# Altium PCB ESP32_HID.PcbDoc
Units mm, origin at the board's own origin, x right, y up, seen from the top; angles counter-clockwise.
Board outline 279.25 x 101.6 mm, 2 copper layers (Top Layer, Bottom Layer); 77 components, 116 nets, 483 pads, 0 vias.
Unrouted connection lines stored in the file: 326.
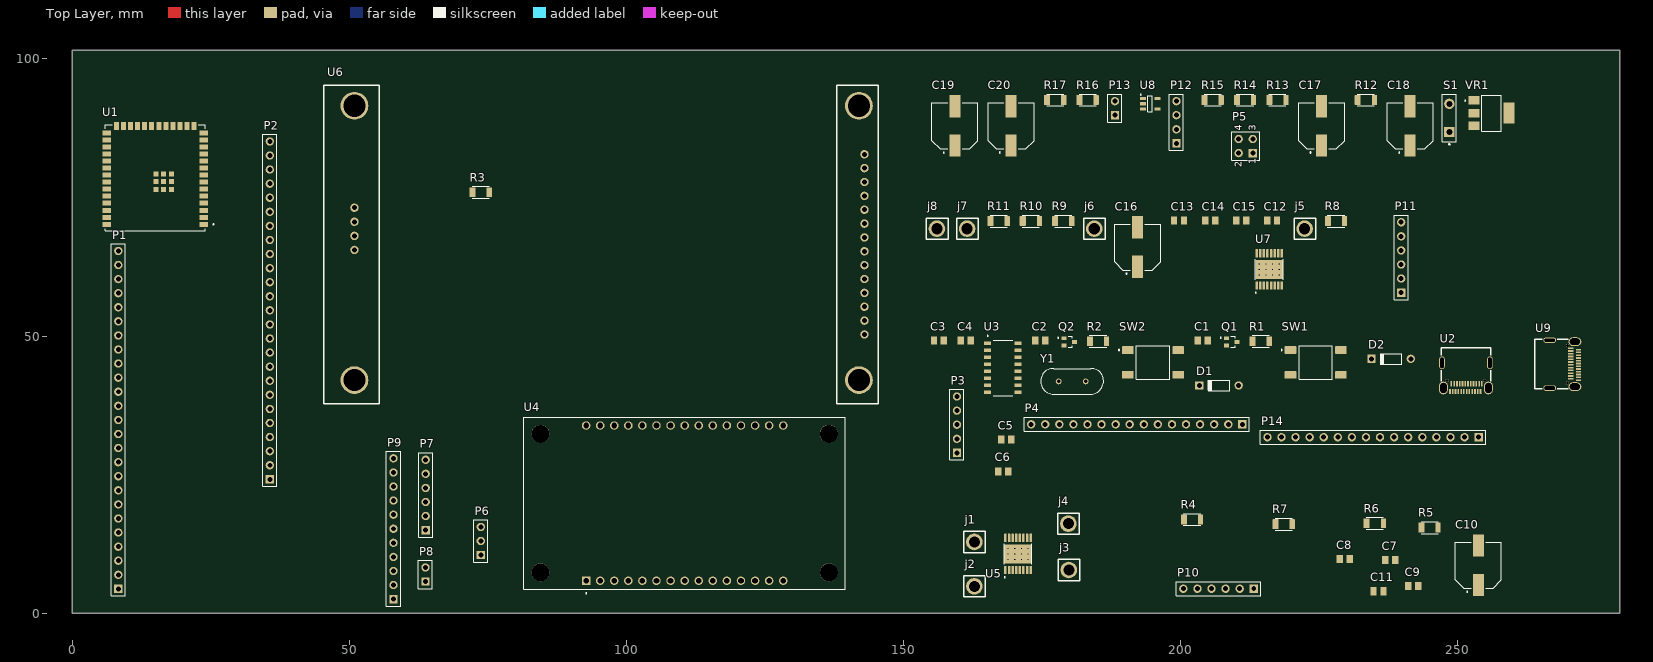
[diagram p0: Top Layer view]
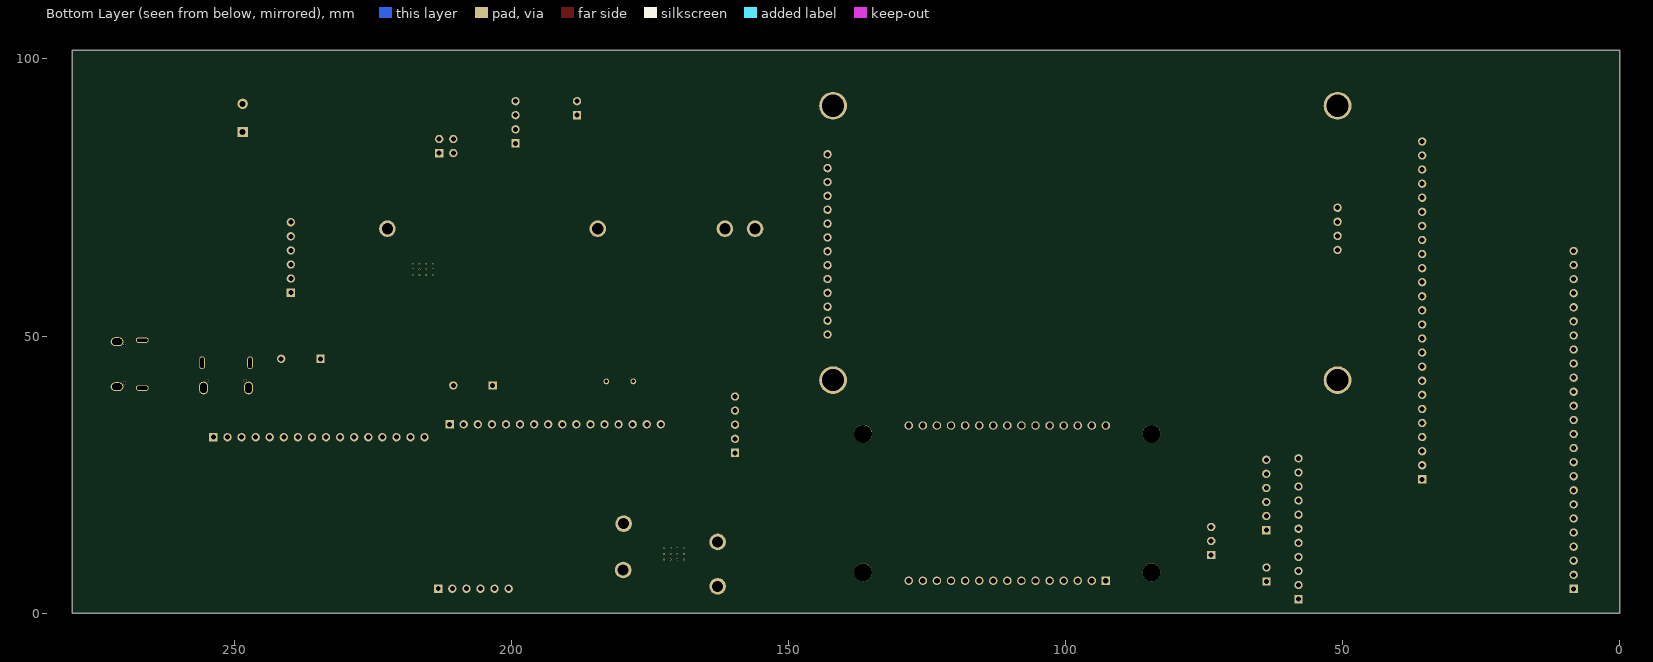
[diagram p1: Bottom Layer view, seen from below]

## Layer stack, top to bottom
Top Solder: solder mask 0.0102, Solder Resist, Dk 3.5
Top Layer: signal copper 0.0356
Dielectric 1: dielectric 0.32, FR-4, Dk 4.8
Bottom Layer: signal copper 0.0356
Bottom Solder: solder mask 0.0102, Solder Resist, Dk 3.5

## Board outline
0,0 279.248,0 279.248,101.6 0,101.6

## Design rules (kind name [scope] priority, off if disabled: settings)
Clearance [All] p1: gap=0.254 ignorepadtopadclearanceinfootprint=FALSE except(0: Arc-Hole Track-Hole SMDPad-Hole THPad-Hole Via-Hole Fill-Hole Poly-Hole Region-Hole Text-Hole)
PolygonConnect [All] p1: connectstyle=Relief reliefconductorwidth=0.254 reliefentries=4 polygonreliefangle="90 Angle" airgapwidth=0.254
RoomDefinition U_NodeMCU [InComponentClass('U_NodeMCU')] p1: confinementstyle=ConfineIn formatcopy=TRUE lockcomponents=FALSE outline 56.363,0.914 141.453,0.914 141.453,35.916 56.363,35.916
RoomDefinition U_USB [InComponentClass('U_USB')] p2: confinementstyle=ConfineIn formatcopy=TRUE lockcomponents=FALSE outline 154.356,24.308 274.955,24.308 274.955,50.851 154.356,50.851
RoomDefinition "U_DC Motor Control_2" [InComponentClass('U_DC Motor Control_2')] p3: confinementstyle=ConfineIn formatcopy=TRUE lockcomponents=FALSE outline 153.746,56.21 241.402,56.21 241.402,72.161 153.746,72.161
RoomDefinition "U_DC Motor Control" [InComponentClass('U_DC Motor Control')] p4: confinementstyle=ConfineIn formatcopy=TRUE lockcomponents=FALSE outline 154.178,22.327 154.178,1.27 154.102,1.194 259.232,1.194 259.232,21.615 258.42,22.428 247.371,22.428
RoomDefinition "U_Power Regulation" [InComponentClass('U_Power Regulation')] p5: confinementstyle=ConfineIn formatcopy=TRUE lockcomponents=FALSE outline 154.559,80.01 260.756,80.01 260.756,94.005 154.559,94.005
RoomDefinition U_ESP32_S2_solo [InComponentClass('U_ESP32_S2_solo')] p6: confinementstyle=ConfineIn formatcopy=TRUE lockcomponents=FALSE outline 4.978,2.769 37.313,2.769 37.313,89.205 4.978,89.205
RoomDefinition GLCD [InComponentClass('GLCD')] p7: confinementstyle=ConfineIn formatcopy=TRUE lockcomponents=FALSE outline 46.431,32.868 147.218,32.868 147.218,97.638 46.431,97.638
RoutingVias [All] p1: holewidth=0.711 width=1.27 viastyle="Through Hole" minholewidth=0.711 minwidth=1.27 maxholewidth=0.711 maxwidth=1.27
SolderMaskExpansion [All] p1: expansion=0.102 istentingtop=FALSE
Width [All] p1: maxlimit=0.254 minlimit=0.254 preferedwidth=0.254
30 further rules are at their usual default settings.

## Classes and differential pairs
component class "U_DC Motor Control_2": C12 C13 C14 C15 C16 j5 j6 j7 j8 P11 R8 R9 R10 R11 U7
component class "U_DC Motor Control": C7 C8 C9 C10 C11 j1 j2 j3 j4 P10 R4 R5 R6 R7 U5
component class "U_Power Regulation": C17 C18 C19 C20 P5 P12 P13 R12 R13 R14 R15 R16 R17 S1 U8 VR1
component class U_NodeMCU: P6 P7 P8 P9 U4
component class U_USB: C1 C2 C3 C4 C5 C6 D1 D2 P3 P4 P14 Q1 Q2 R1 R2 SW1 SW2 U2 U3 U9 Y1
component class GLCD: R3
component class U_ESP32_S2_solo: P1 P2 U1

## Components (designator, comment, footprint, x,y, rotation, side; value= is the part's Value field where it differs from the comment)
C1 "0.1uf" CAPC2012X140N 203.987,49.2 r0 top
C2 "0.1uf" CAPC2012X140N 174.65,49.2 r0 top
C3 "0.1uf" CAPC2012X140N 156.388,49.2 r0 top
C4 "0.1uf" CAPC2012X140N 161.214,49.2 r0 top
C5 "33pf" CAPC2012X140N 168.504,31.344 r0 top
C6 "33pf" CAPC2012X140N 167.996,25.603 r0 top
C7 "LD051A121KAB2A" CAPC2012X140N 237.82,9.601 r0 top
C8 "LD051A121KAB2A" CAPC2012X140N 229.616,9.779 r0 top
C9 "LD051A121KAB2A" CAPC2012X140N 241.986,4.928 r0 top
C10 "EEEHA1V101UP" CAP_EEEHA1V101UP 253.695,8.661 r90 top
C11 "LD051A121KAB2A" CAPC2012X140N 235.687,3.962 r0 top
C12 "LD051A121KAB2A" CAPC2012X140N 216.484,70.866 r0 top
C13 "LD051A121KAB2A" CAPC2012X140N 199.695,70.866 r0 top
C14 "LD051A121KAB2A" CAPC2012X140N 205.308,70.866 r0 top
C15 "LD051A121KAB2A" CAPC2012X140N 210.896,70.866 r0 top
C16 "EEEHA1V101UP" CAP_EEEHA1V101UP 192.227,66.065 r90 top
C17 "EEEHA1V101UP" CAP_EEEHA1V101UP 225.425,87.909 r90 top
C18 "EEEHA1V101UP" CAP_EEEHA1V101UP 241.402,87.909 r90 top
C19 "EEEHA1V101UP" CAP_EEEHA1V101UP 159.258,87.909 r90 top
C20 "EEEHA1V101UP" CAP_EEEHA1V101UP 169.393,87.909 r90 top
D1 "Diode 1N4148" DO-35 206.908,41.097 r180 top
D2 "Diode 1N4148" DO-35 237.973,45.898 r180 top
j1 "Motor" Motor_pin 162.789,12.852 r0 top
j2 "Motor" Motor_pin 162.789,4.851 r0 top
j3 "Motor" Motor_pin 179.832,7.798 r0 top
j4 "Motor" Motor_pin 179.73,16.154 r0 top
j5 "Motor" Motor_pin 222.352,69.367 r0 top
j6 "Motor" Motor_pin 184.404,69.367 r0 top
j7 "Motor" Motor_pin 161.468,69.367 r0 top
j8 "Motor" Motor_pin 156.032,69.367 r0 top
P1 "Header 25" HDR1X25 8.357,4.394 r90 top
P2 "Header 25" HDR1X25 35.687,24.155 r90 top
P3 "Header 5" HDR1X5 159.639,28.931 r90 top
P4 "Header 16" HDR1X16 211.125,34.087 r180 top
P5 "Header 2X2" HDR2X2 213.004,83.007 r90 top
P6 "Header 3" HDR1X3 73.736,10.49 r90 top
P7 "Header 6" HDR1X6 63.805,14.986 r90 top
P8 "Header 2" HDR1X2 63.754,5.715 r90 top
P9 "Header 11" HDR1X11 57.988,2.54 r90 top
P10 "Header 6" HDR1X6 213.182,4.42 r180 top
P11 "Header 6" HDR1X6 239.776,57.836 r90 top
P12 "Header 4" HDR1X4 199.238,84.76 r90 top
P13 "Header 2" HDR1X2 188.138,89.84 r90 top
P14 "Header 16" HDR1X16 253.746,31.75 r180 top
Q1 "BC846BW_RF" TRANS_BC846BW_RF 209.194,48.946 r0 top
Q2 "BC846BW_RF" TRANS_BC846BW_RF 179.857,48.946 r0 top
R1 "10k" RESC3115X65N 214.427,49.073 r0 top
R2 "10k" RESC3115X65N 185.09,49.073 r0 top
R3 "10k" RESC3115X65N 73.736,75.946 r0 top
R4 "1-1879462-4" RESC3115X65N 202.032,16.891 r0 top
R5 "1-1879462-4" RESC3115X65N 244.907,15.443 r0 top
R6 "1-1879462-4" RESC3115X65N 235.026,16.231 r0 top
R7 "1-1879462-4" RESC3115X65N 218.592,16.078 r0 top
R8 "1-1879462-4" RESC3115X65N 228.016,70.739 r0 top
R9 "1-1879462-4" RESC3115X65N 178.816,70.739 r0 top
R10 "1-1879462-4" RESC3115X65N 172.974,70.739 r0 top
R11 "1-1879462-4" RESC3115X65N 167.157,70.739 r0 top
R12 "1k" RESC3115X65N 233.401,92.583 r0 top
R13 "1k" RESC3115X65N 217.449,92.583 r0 top
R14 "1k" RESC3115X65N 211.607,92.583 r0 top
R15 "1k" RESC3115X65N 205.765,92.583 r0 top
R16 "0 ohm" RESC3115X65N 183.21,92.583 r0 top
R17 "1k" RESC3115X65N 177.368,92.583 r0 top
S1 "SW-SPST" SPST-2 248.463,89.357 r90 top
SW1 "FSM4JSMA" TE_FSM4JSMA 224.358,45.237 r0 top
SW2 "FSM4JSMA" TE_FSM4JSMA 195.021,45.237 r0 top
U1 "ESP32-S2-SOLO-U-N4R2" XCVR_ESP32-S2-SOLO-U-N4R2 15.011,78.562 r180 top
U2 "USB-TYPE-C-FEMAIL" C5156605 250.571,43.866 r180 top
U3 "CH340G" SOIC127P600X180-16N 167.919,44.272 r0 top
U4 "VMA107" MODULE_VMA107 110.515,19.863 r90 top
U5 "DRV8833PWPR" IC_DRV8833PWPR 170.663,10.693 r90 top
U6 "3.5 Inch TFT LCD Module With Touch" PCBCOMPONENT_1 142.951,50.292 r180 top
U7 "DRV8833PWPR" IC_DRV8833PWPR 215.976,62.027 r90 top
U8 "MIC5205-2.5YM5-TR" SOT95P280X145-5N 194.488,91.897 r0 top
U9 "USB-TYPE-C-FEMAIL" C5156605 267.894,44.044 r270 top
VR1 "NCP1117STAT3G" VREG_NCP1117STAT3G 256.057,90.221 r0 top
Y1 "12MHZ" XTAL_ECS-51-S-1 180.416,41.808 r180 top

## Footprints (in the part's own frame and the unit in brackets; to place one, negate y for a bottom-side part, rotate by r counter-clockwise, add the part's x,y. Pads: shape width x height; smd on the part's side, far side on the other; paste and mask are expansions set on the pad)
C5156605 [mm] "USB-C-FMAIL"
  oval 1x2.3 hole 0.6 slot 1.9 at 90 deg: 15(-5.209,-1.318) 16(3.431,-1.318)
  oval 1.6x2.3 hole 1.2 slot 1.8 at 90 deg: 17(3.171,3.232) 18(-4.949,3.232)
  rect 0.3x0.95 smd: A1(-3.514,3.858) A2(-3.014,3.858) A3(-2.514,3.858) A4(-2.014,3.858) A5(-1.514,3.858) A6(-1.014,3.858) A7(-0.514,3.858) A8(-0.014,3.858) A9(0.486,3.858) A10(0.986,3.858) A11(1.486,3.858) A12(1.986,3.858) B1(1.736,2.458) B2(1.236,2.458) B3(0.736,2.458) B4(0.236,2.458) B5(-0.264,2.458) B6(-0.764,2.458) B7(-1.264,2.458) B8(-1.764,2.458) B9(-2.264,2.458) B10(-2.764,2.458) B11(-3.264,2.458) B12(-3.764,2.458)
  round 0.55 hole 0.55 unplated: ""(-4.289,1.882) ""(2.511,1.882)
  silkscreen extent -5.36,-4.02 3.58,2.01
CAP_EEEHA1V101UP [mm]
  rect 4x2 smd: 1(-3.55,0) 2(3.55,0)
  silkscreen extent -4.9,-4.15 4.15,4.15, body extent -4.85,-4.15 4.85,4.15, height 10.2
CAPC2012X140N [mm]
  rect 1.15x1.45 smd: 1(-0.9,0) 2(0.9,0)
  body extent -1,-0.63 1,0.63, height 0.94
DO-35 [mm] "Diode, Axial; Body 3.8 x 1.9 mm (LxDia. max), Lead Dia. 0.53 mm (max)"
  round 1.5 hole 0.9: 1(-3.55,0)
  rect 1.5x1.5 hole 0.9: 2(3.55,0)
  silkscreen extent -1.95,-0.95 2.05,0.95
HDR1X2 [mm] "Connector; Header; 2 Position"
  rect 1.5x1.5 hole 0.9: 1(0,0)
  round 1.5 hole 0.9: 2(2.54,0)
  silkscreen extent -1.27,-1.27 3.81,1.27
HDR1X3 [mm] "Connector; Header; 3 Position"
  rect 1.5x1.5 hole 0.9: 1(0,0)
  round 1.5 hole 0.9: 2(2.54,0) 3(5.08,0)
  silkscreen extent -1.27,-1.27 6.35,1.27
HDR1X4 [mm] "Connector; Header; 4 Position"
  rect 1.5x1.5 hole 0.9: 1(0,0)
  round 1.5 hole 0.9: 2(2.54,0) 3(5.08,0) 4(7.62,0)
  silkscreen extent -1.27,-1.27 8.89,1.27
HDR1X5 [mm] "Connector; Header; 5 Position"
  rect 1.5x1.5 hole 0.9: 1(0,0)
  round 1.5 hole 0.9: 2(2.54,0) 3(5.08,0) 4(7.62,0) 5(10.16,0)
  silkscreen extent -1.27,-1.27 11.43,1.27
HDR1X6 [mm] "Connector; Header; 6 Position"
  rect 1.5x1.5 hole 0.9: 1(0,0)
  round 1.5 hole 0.9: 2(2.54,0) 3(5.08,0) 4(7.62,0) 5(10.16,0) 6(12.7,0)
  silkscreen extent -1.27,-1.27 13.97,1.27
HDR1X11 [mm] "Connector; Header; 11 Position"
  rect 1.5x1.5 hole 0.9: 1(0,0)
  round 1.5 hole 0.9: 2(2.54,0) 3(5.08,0) 4(7.62,0) 5(10.16,0) 6(12.7,0) 7(15.24,0) 8(17.78,0) 9(20.32,0) 10(22.86,0) 11(25.4,0)
  silkscreen extent -1.27,-1.27 26.67,1.27
HDR1X16 [mm] "Connector; Header; 16 Position"
  rect 1.5x1.5 hole 0.9: 1(0,0)
  round 1.5 hole 0.9: 2(2.54,0) 3(5.08,0) 4(7.62,0) 5(10.16,0) 6(12.7,0) 7(15.24,0) 8(17.78,0) 9(20.32,0) 10(22.86,0) 11(25.4,0) 12(27.94,0) 13(30.48,0) 14(33.02,0) 15(35.56,0) 16(38.1,0)
  silkscreen extent -1.27,-1.27 39.37,1.27
HDR1X25 [mm] "Connector; Header; 25 Position"
  rect 1.5x1.5 hole 0.9: 1(0,0)
  round 1.5 hole 0.9: 2(2.54,0) 3(5.08,0) 4(7.62,0) 5(10.16,0) 6(12.7,0) 7(15.24,0) 8(17.78,0) 9(20.32,0) 10(22.86,0) 11(25.4,0) 12(27.94,0) 13(30.48,0) 14(33.02,0) 15(35.56,0) 16(38.1,0) 17(40.64,0) 18(43.18,0) 19(45.72,0) 20(48.26,0) 21(50.8,0) 22(53.34,0) 23(55.88,0) 24(58.42,0) 25(60.96,0)
  silkscreen extent -1.27,-1.27 62.23,1.27
HDR2X2 [mm] "Connector; Header; 2x2 Position"
  rect 1.5x1.5 hole 0.9: 1(0,0)
  round 1.5 hole 0.9: 2(0,2.54) 3(2.54,0) 4(2.54,2.54)
  silkscreen extent -1.27,-1.27 3.81,3.81
IC_DRV8833PWPR [mm]
  rrect25% 1.5x0.45 smd: 1(-2.9,2.275) 2(-2.9,1.625) 3(-2.9,0.975) 4(-2.9,0.325) 5(-2.9,-0.325) 6(-2.9,-0.975) 7(-2.9,-1.625) 8(-2.9,-2.275) 9(2.9,-2.275) 10(2.9,-1.625) 11(2.9,-0.975) 12(2.9,-0.325) 13(2.9,0.325) 14(2.9,0.975) 15(2.9,1.625) 16(2.9,2.275)
  rect 3.4x5 smd paste-3 mask+0: 17(0,0)
  round 0.3 hole 0.2 mask+0: 18(-1,1.8) 19(0,1.8) 20(1,1.8) 21(-1,0.6) 22(0,0.6) 23(1,0.6) 24(-1,-0.6) 25(0,-0.6) 26(1,-0.6) 27(-1,-1.8) 28(0,-1.8) 29(1,-1.8)
  silkscreen extent -4.3,-2.5 1.83,2.5, body extent -3.2,-2.5 3.2,2.5, height 1.2
MODULE_VMA107 [mm]
  rect 1.53x1.53 hole 1.02: 1(-14,17.78)
  round 1.53 hole 1.02: 2(-14,15.24) 3(-14,12.7) 4(-14,10.16) 5(-14,7.62) 6(-14,5.08) 7(-14,2.54) 8(-14,0) 9(-14,-2.54) 10(-14,-5.08) 11(-14,-7.62) 12(-14,-10.16) 13(-14,-12.7) 14(-14,-15.24) 15(-14,-17.78) 16(14,-17.78) 17(14,-15.24) 18(14,-12.7) 19(14,-10.16) 20(14,-7.62) 21(14,-5.08) 22(14,-2.54) 23(14,0) 24(14,2.54) 25(14,5.08) 26(14,7.62) 27(14,10.16) 28(14,12.7) 29(14,15.24) 30(14,17.78)
  round 3.25 hole 3.25 unplated: ""(-12.5,26) ""(-12.5,-26) ""(12.5,26) ""(12.5,-26)
  silkscreen extent -16.35,-29 15.5,29
Motor_pin [mm]
  round 3 hole 2: 1(0,0)
  silkscreen extent -1.9,-1.9 2,1.9
PCBCOMPONENT_1 [mm]
  round 1.524 hole 0.9: 1(0,0) 2(0,-2.5) 3(0,-5) 4(0,-7.5) 5(0,-10) 6(0,-12.5) 7(0,-15) 8(0,-17.5) 9(0,-20) 10(0,-22.5) 11(0,-25) 12(0,-27.5) 13(0,-30) 14(0,-32.5) 15(92,-22.86) 16(92,-20.32) 17(92,-17.78) 18(92,-15.24)
  round 5 hole 4: ""(1,8.24) ""(1,-41.26) ""(92,-41.26) ""(92,8.24)
  silkscreen extent -2.5,-45 97.5,12.5
RESC3115X65N [mm]
  rrect14% 1.09x1.77 smd: 1(-1.465,0)
  rrect14% 0.94x1.77 smd: 2(1.54,0)
  silkscreen extent -1.55,-1.06 1.55,1.06
SOIC127P600X180-16N [mm]
  rrect25% 1.31x0.62 smd: 1(-2.75,4.445) 2(-2.75,3.175) 3(-2.75,1.905) 4(-2.75,0.635) 5(-2.75,-0.635) 6(-2.75,-1.905) 7(-2.75,-3.175) 8(-2.75,-4.445) 9(2.75,-4.445) 10(2.75,-3.175) 11(2.75,-1.905) 12(2.75,-0.635) 13(2.75,0.635) 14(2.75,1.905) 15(2.75,3.175) 16(2.75,4.445)
  silkscreen extent -2.85,-5 1.78,5.85, body extent -3,-5 3,5, height 1.8
SOT95P280X145-5N [mm]
  rect 1.1x0.6 smd: 1(-1.3,0.95) 2(-1.3,0) 3(-1.3,-0.95) 4(1.3,-0.95) 5(1.3,0.95)
  silkscreen extent -1.78,-1.45 0.43,1.77, body extent -1.45,-1.35 1.45,1.35, height 1.45
SPST-2 [mm] "Switch; 2 Leads"
  rect 1.85x1.85 hole 1.1: 1(-2.54,0)
  round 1.85 hole 1.1: 2(2.54,0)
  silkscreen extent -4.89,-1.27 4.28,1.27
TE_FSM4JSMA [mm]
  rrect15% 2.1x1.38 smd: 1(-4.55,2.24) 2(4.55,2.24) 3(-4.55,-2.24) 4(4.55,-2.24)
  silkscreen extent -6.25,-3 3,3, body extent -3,-5 3,5, height 4.98
TRANS_BC846BW_RF [mm]
  rect 0.9x0.7 smd: 1(-0.95,0.65) 2(-0.95,-0.65) 3(0.95,0)
  silkscreen extent -2.07,-1 0.63,1, body extent -1.05,-1 1.05,1, height 1.1
VREG_NCP1117STAT3G [mm]
  rect 2x1.5 smd: 1(-3.15,2.3) 2(-3.15,0) 3(-3.15,-2.3)
  rect 2x3.8 smd: 4(3.15,0)
  silkscreen extent -4.85,-3.25 1.75,3.25, body extent -3.5,-3.25 3.5,3.25, height 1.8
XCVR_ESP32-S2-SOLO-U-N4R2 [mm]
  rect 1.5x0.9 smd: 1(-8.75,8.41) 2(-8.75,7.14) 3(-8.75,5.87) 4(-8.75,4.6) 5(-8.75,3.33) 6(-8.75,2.06) 7(-8.75,0.79) 8(-8.75,-0.48) 9(-8.75,-1.75) 10(-8.75,-3.02) 11(-8.75,-4.29) 12(-8.75,-5.56) 13(-8.75,-6.83) 14(-8.75,-8.1) 27(8.75,-8.1) 28(8.75,-6.83) 29(8.75,-5.56) 30(8.75,-4.29) 31(8.75,-3.02) 32(8.75,-1.75) 33(8.75,-0.48) 34(8.75,0.79) 35(8.75,2.06) 36(8.75,3.33) 37(8.75,4.6) 38(8.75,5.87) 39(8.75,7.14) 40(8.75,8.41)
  rect 0.9x1.5 smd: 15(-6.985,-9.35) 16(-5.715,-9.35) 17(-4.445,-9.35) 18(-3.175,-9.35) 19(-1.905,-9.35) 20(-0.635,-9.35) 21(0.635,-9.35) 22(1.905,-9.35) 23(3.175,-9.35) 24(4.445,-9.35) 25(5.715,-9.35) 26(6.985,-9.35)
  rect 0.9x0.9 smd: 41_1(-2.9,2.09) 41_2(-1.5,2.09) 41_3(-0.1,2.09) 41_4(-2.9,0.69) 41_5(-1.5,0.69) 41_6(-0.1,0.69) 41_7(-2.9,-0.71) 41_8(-1.5,-0.71) 41_9(-0.1,-0.71)
  silkscreen extent -10.6,-9.6 9,9.6
XTAL_ECS-51-S-1 [mm]
  round 1.03 hole 0.63: 1(-2.44,0) 2(2.44,0)
  silkscreen extent -5.68,-2.33 5.68,2.33, body extent -5.47,-2.5 5.88,2.5, height 13.46

## Part data
C1 C2 C3 C4 C5 C6: library part LD051A121KAB2A, "120PF 100V 10% 0805", Package=None, Availability=Unavailable, MF="{'manufacturer': u'AVX'}", MP=LD051A121KAB2A, Price=None
C7 C8 C9 C11 C12 C13 C14 C15: "120PF 100V 10% 0805", Package=None, Availability=Unavailable, MF="{'manufacturer': u'AVX'}", MP=LD051A121KAB2A, Price=None
C10 C16 C17 C18 C19 C20 Q1 Q2 U1 U3: Package=None, Availability=Unavailable, Price=None
  C10 C16 C17 C18 C19 C20: MF="{'manufacturer': u'Panasonic'}", MP=EEEHA1V101UP
  Q1 Q2: MF="{'manufacturer': u'Taiwan Semiconductor'}", MP=BC846BW_RF
  U1: MF="{'manufacturer': u'Espressif Systems'}", MP=ESP32-S2-SOLO-U-N4R2
  U3: MF="{'manufacturer': u'WCH'}", MP=CH340G
D1 D2: "High Conductance Fast Diode", Code_JEDEC=DO-204-AH, ComponentLink1Description="Manufacturer Link", ComponentLink1URL=http://www.fairchildsemi.com/, ComponentLink2Description=Datasheet, ComponentLink2URL=http://www.fairchildsemi.com/ds/1N%2F1N4148.pdf, DatasheetVersion=1997, LatestRevisionDate=17-Jul-2002, LatestRevisionNote="Re-released for DXP Platform.", PackageDescription="Diode, Axial; Body 3.8 x 1.9 mm (LxDia. max), Lead Dia. 0.53 mm (max)", PackageReference=DO-35, Published=8-Jun-2000, Publisher="Altium Limited"
P1 P2: "Header, 25-Pin", LatestRevisionDate=17-Jul-2002, LatestRevisionNote="Re-released for DXP Platform.", Publisher="Altium Limited"
P3: "Header, 5-Pin", LatestRevisionDate=17-Jul-2002, LatestRevisionNote="Re-released for DXP Platform.", Publisher="Altium Limited"
P4 P14: "Header, 16-Pin", LatestRevisionDate=17-Jul-2002, LatestRevisionNote="Re-released for DXP Platform.", Publisher="Altium Limited"
P5: "Header, 2-Pin, Dual row", LatestRevisionDate=17-Jul-2002, LatestRevisionNote="Re-released for DXP Platform.", Publisher="Altium Limited"
P6: "Header, 3-Pin", LatestRevisionDate=17-Jul-2002, LatestRevisionNote="Re-released for DXP Platform.", Publisher="Altium Limited"
P7 P10 P11: "Header, 6-Pin", LatestRevisionDate=17-Jul-2002, LatestRevisionNote="Re-released for DXP Platform.", Publisher="Altium Limited"
P8 P13: "Header, 2-Pin", LatestRevisionDate=17-Jul-2002, LatestRevisionNote="Re-released for DXP Platform.", Publisher="Altium Limited"
P9: "Header, 11-Pin", LatestRevisionDate=17-Jul-2002, LatestRevisionNote="Re-released for DXP Platform.", Publisher="Altium Limited"
P12: "Header, 4-Pin", LatestRevisionDate=17-Jul-2002, LatestRevisionNote="Re-released for DXP Platform.", Publisher="Altium Limited"
R1 R2 R3 R12 R13 R14 R15 R16 R17: library part 1-1879462-4, "RL73H 2B R43 1% 10 RL", Package=None, Availability=Unavailable, MF="{'manufacturer': u'TE Connectivity'}", MP=1-1879462-4, Price=None
R4 R5 R6 R7 R8 R9 R10 R11: "RL73H 2B R43 1% 5K RL", Package=None, Availability=Unavailable, MF="{'manufacturer': u'TE Connectivity'}", MP=1-1879462-4, Price=None
S1: "Single-Pole, Single-Throw Switch", LatestRevisionDate=17-Jul-2002, LatestRevisionNote="Re-released for DXP Platform.", PackageDescription="Switch; 2 Leads", PackageReference=SPST-2, Published=24-Mar-1999, Publisher="Altium Limited"
SW1 SW2: "Switch Tactile OFF (ON) SPST Round Button Gull Wing 0.05A 24VDC 2.6N SMD T/R", Package=None, Availability=Unavailable, MF="{'manufacturer': u'TE Connectivity'}", MP=FSM4JSMA, Price=None
U4: "NodeMCU V2 Lua Based ESP8266 Development Board", Package=None, Availability=Unavailable, MF="{'manufacturer': u'Velleman'}", MP=VMA107, Price=None
U5 U7: "10.8-V, 2-A dual H-bridge motor driver with current regulation 16-HTSSOP -40 to 85", Package=None, Availability=Unavailable, MF="{'manufacturer': u'Texas Instruments'}", MP=DRV8833PWPR, Price=None
U6: library part ILI9488, ComponentLink1Description="New link", ComponentLink1URL=https://www.aliexpress.com/item/32954128438.html?spm=a2g0o.order_list.order_list_main.44.5fd61802HfjXd0
U8: "MIC5205 Series 3 V Fixed Output 150 mA SMT Low-Noise LDO Regulator - SOT-23-5", Package=None, Availability=Unavailable, MF="{'manufacturer': u'Microchip Technology'}", MP=MIC5205-2.5YM5-TR, Price=None
VR1: "Linear Voltage Regulator IC 1 Output 1A SOT-223", Package=None, Availability=Unavailable, MF="{'manufacturer': u'ON Semiconductor'}", MP=NCP1117STAT3G, Price=None
Y1: library part ECS-51-S-1, Package=None, Availability=Unavailable, MF="{'manufacturer': u'ECS'}", MP=ECS-51-S-1, Price=None

## Nets (pads, with @x,y where several pads share a name; then routed paths per layer and width w, separated by ;. In a path a pad name is that pad's centre, name@x,y a point inside that pad or via, vN(x,y) a via of type N, cw(c..) or ccw(c..) an arc to the next point about the centre after c; other vN are vias at no path point)
3V3: P1.4 P1.5 P1.6 P1.7 P2.1 P12.3 P13.1 U1.2 U4.9 U4.11 U4.16 U4.25 U8.5
AIN1: P2.13 P10.3 U1.20 U5.16
AIN1_2: P2.19 P11.3 U1.6 U7.16
AIN2: P2.12 P10.4 U1.21 U5.15
AIN2_2: P2.18 P11.4 U1.7 U7.15
BIN1: P2.11 P10.5 U1.22 U5.9
BIN1_2: P2.17 P11.5 U1.12 U7.9
BIN2: P2.10 P10.6 U1.8 U5.10
BIN2_2: P2.16 P11.6 U1.17 U7.10
D9: P8.1 P9.10 U4.19
D10: P8.2 P9.11 U4.18
D+: P4.1 P4.4 P14.1 P14.4 U2.A6 U2.B6 U3.5 U9.A6 U9.B6
D-: P4.2 P4.3 P14.2 P14.3 U2.A7 U2.B7 U3.6 U9.A7 U9.B7
DTR: Q2.3 R1.1 U3.13
EN: C1.1 P1.12 Q1.3 SW1.1 U1.3
GLCD_CON1: P1.25 P9.9 U1.25 U4.20 U6.3
GLCD_CON2: P1.24 P9.5 U1.28 U4.26 U6.4
GLCD_CON3: P1.23 P9.4 U1.29 U4.27 U6.5
GLCD_CON4: P1.22 P9.8 U1.30 U4.21 U6.6 U6.12 U6.17
GLCD_CON5: P1.21 P9.6 U1.31 U4.23 U6.7 U6.10 U6.15
GLCD_CON6: P1.20 P9.7 R3.1 U1.32 U4.22 U6.13 U6.16
GLCD_CON7: P1.19 P9.3 U1.33 U4.28 U6.11
GLCD_CON8: P1.18 P9.2 U1.34 U4.29 U6.14
GLCD_CON9: P1.17 P9.1 U1.35 U4.30 U6.18
GND: C1.2 C2.2 C3.1 C4.1 C5.2 C6.2 C7.2 C8.2 C9.2 C10.2 C13.2 C14.2 C15.2 C16.2 C17.2 C18.2 C19.2 C20.2 P1.8 P1.9 P1.10 P1.11 P2.2 P5.3 P5.4 P12.1 R6.1 R7.1 R10.1 R11.1 R12.1 R13.2 R15.1 R17.1 SW1.4 SW2.4 U1.1 U1.40 U1.41_1 U1.41_2 U1.41_3 U1.41_4 U1.41_5 U1.41_6 U1.41_7 U1.41_8 U1.41_9 U2.15 U2.16 U2.17 U2.18 U2.A1 U2.A12 U2.B1 U2.B12 U3.1 U4.8 U4.10 U4.14 U4.17 U4.24 U5.13 U5.17 U6.2 U7.13 U7.17 U8.2 U9.15 U9.16 U9.17 U9.18 U9.A1 U9.A12 U9.B1 U9.B12 VR1.1
IO0: C2.1 P2.25 Q2.2 SW2.1 U1.27
IO1: P2.24 U1.39
IO2: P2.23 U1.38
IO3: P2.22 U1.15
IO16: P2.9 U1.9
IO17: P2.8 U1.10
IO18: P2.7 U1.11
IO19: P2.6 U1.13
IO20: P2.5 U1.14
IO21: P2.4 U1.23
IO33: P2.3 U1.24
IO45: P1.16 U1.26
IO46: P1.15 U1.16
NetC3_2: C3.2 U3.4
NetC5_1: C5.1 U3.7 Y1.2
NetC6_1: C6.1 U3.8 Y1.1
NetC7_1: C7.1 C8.1 C9.1 U5.14
NetC11_2: C11.2 U5.11
NetC12_2: C12.2 U7.11
NetC13_1: C13.1 C14.1 C15.1 U7.14
NetC20_1: C20.1 R16.2 U8.4
NetD1_1: D1.1 U2.A4 U2.A9 U2.B4 U2.B9
NetD2_1: D2.1 U9.A4 U9.A9 U9.B4 U9.B9
Netj1_1: j1.1 U5.2
Netj2_1: j2.1 U5.4
Netj3_1: j3.1 U5.7
Netj4_1: j4.1 U5.5
Netj5_1: j5.1 U7.2
Netj6_1: j6.1 U7.4
Netj7_1: j7.1 U7.7
Netj8_1: j8.1 U7.5
NetP3_2: P3.2 U3.11
NetP3_3: P3.3 U3.12
NetP3_4: P3.4 U3.10
NetP3_5: P3.5 U3.9
NetP4_5: P4.5 U2.A10
NetP4_6: P4.6 U2.A11
NetP4_7: P4.7 U2.B10
NetP4_8: P4.8 U2.B11
NetP4_9: P4.9 U2.A5
NetP4_10: P4.10 U2.B5
NetP4_11: P4.11 U2.B8
NetP4_12: P4.12 U2.A8
NetP4_13: P4.13 U2.B3
NetP4_14: P4.14 U2.B2
NetP4_15: P4.15 U2.A3
NetP4_16: P4.16 U2.A2
NetP5_2: P5.2 S1.1
NetP6_1: P6.1 U4.1
NetP6_2: P6.2 U4.12
NetP6_3: P6.3 U4.13
NetP7_1: P7.1 U4.7
NetP7_2: P7.2 U4.6
NetP7_3: P7.3 U4.5
NetP7_4: P7.4 U4.4
NetP7_5: P7.5 U4.3
NetP7_6: P7.6 U4.2
NetP13_2: P13.2 R16.1 R17.2
NetP14_5: P14.5 U9.A10
NetP14_6: P14.6 U9.A11
NetP14_7: P14.7 U9.B10
NetP14_8: P14.8 U9.B11
NetP14_9: P14.9 U9.A5
NetP14_10: P14.10 U9.B5
NetP14_11: P14.11 U9.B8
NetP14_12: P14.12 U9.A8
NetP14_13: P14.13 U9.B3
NetP14_14: P14.14 U9.B2
NetP14_15: P14.15 U9.A3
NetP14_16: P14.16 U9.A2
NetQ1_1: Q1.1 R1.2
NetQ2_1: Q2.1 R2.2
NetR3_2: R3.2 U6.9
NetR4_1: R4.1 R5.2
NetR6_2: R6.2 U5.3
NetR7_2: R7.2 U5.6
NetR8_1: R8.1 R9.2
NetR10_2: R10.2 U7.3
NetR11_2: R11.2 U7.6
NetR13_1: R13.1 R14.2
NetR14_1: R14.1 R15.2
NFAULT: P2.15 P10.1 U1.18 U5.8
NFAULT_2: P2.21 P11.1 U1.4 U7.8
NSLEEP: P2.14 P10.2 R5.1 U1.19 U5.1
NSLEEP_2: P2.20 P11.2 R9.1 U1.5 U7.1
RS232: P3.1 U3.15
RST: Q1.2 R2.1 U3.14
UART1: P1.14 U1.36 U3.2
UART2: P1.13 U1.37 U3.3
VCC: C4.2 C18.1 C19.1 D1.2 D2.2 P1.1 P1.2 P1.3 P12.4 R12.2 U3.16 U4.15 U6.1 U6.8 U8.1 VR1.2 VR1.4
VMOT: C10.1 C11.1 C12.1 C16.1 C17.1 P5.1 P12.2 R4.2 R8.2 S1.2 U5.12 U7.12 VR1.3
pads on no net: SW1.2 SW1.3 SW2.2 SW2.3 U2. U4. U5.18 U5.19 U5.20 U5.21 U5.22 U5.23 U5.24 U5.25 U5.26 U5.27 U5.28 U5.29 U6. U7.18 U7.19 U7.20 U7.21 U7.22 U7.23 U7.24 U7.25 U7.26 U7.27 U7.28 U7.29 U8.3 U9.

## Text inside footprints (layer, text, board x,y; h text height)
P5: Top Overlay "1" at 213.512,80.975 h1.27 r90; Top Overlay "2" at 210.972,80.467 h1.27 r90; Top Overlay "4" at 210.972,87.071 h1.27 r90; Top Overlay "3" at 213.512,87.071 h1.27 r90